# Altium PCB Power_Regulator.PcbDoc
Units mil, origin at the board's own origin, x right, y up, seen from the top; angles counter-clockwise.
Board outline 2710 x 2100 mil, 2 copper layers (Top Layer, Bottom Layer), stack 62.8 mil thick; 15 components, 30 nets, 62 pads, 20 vias.
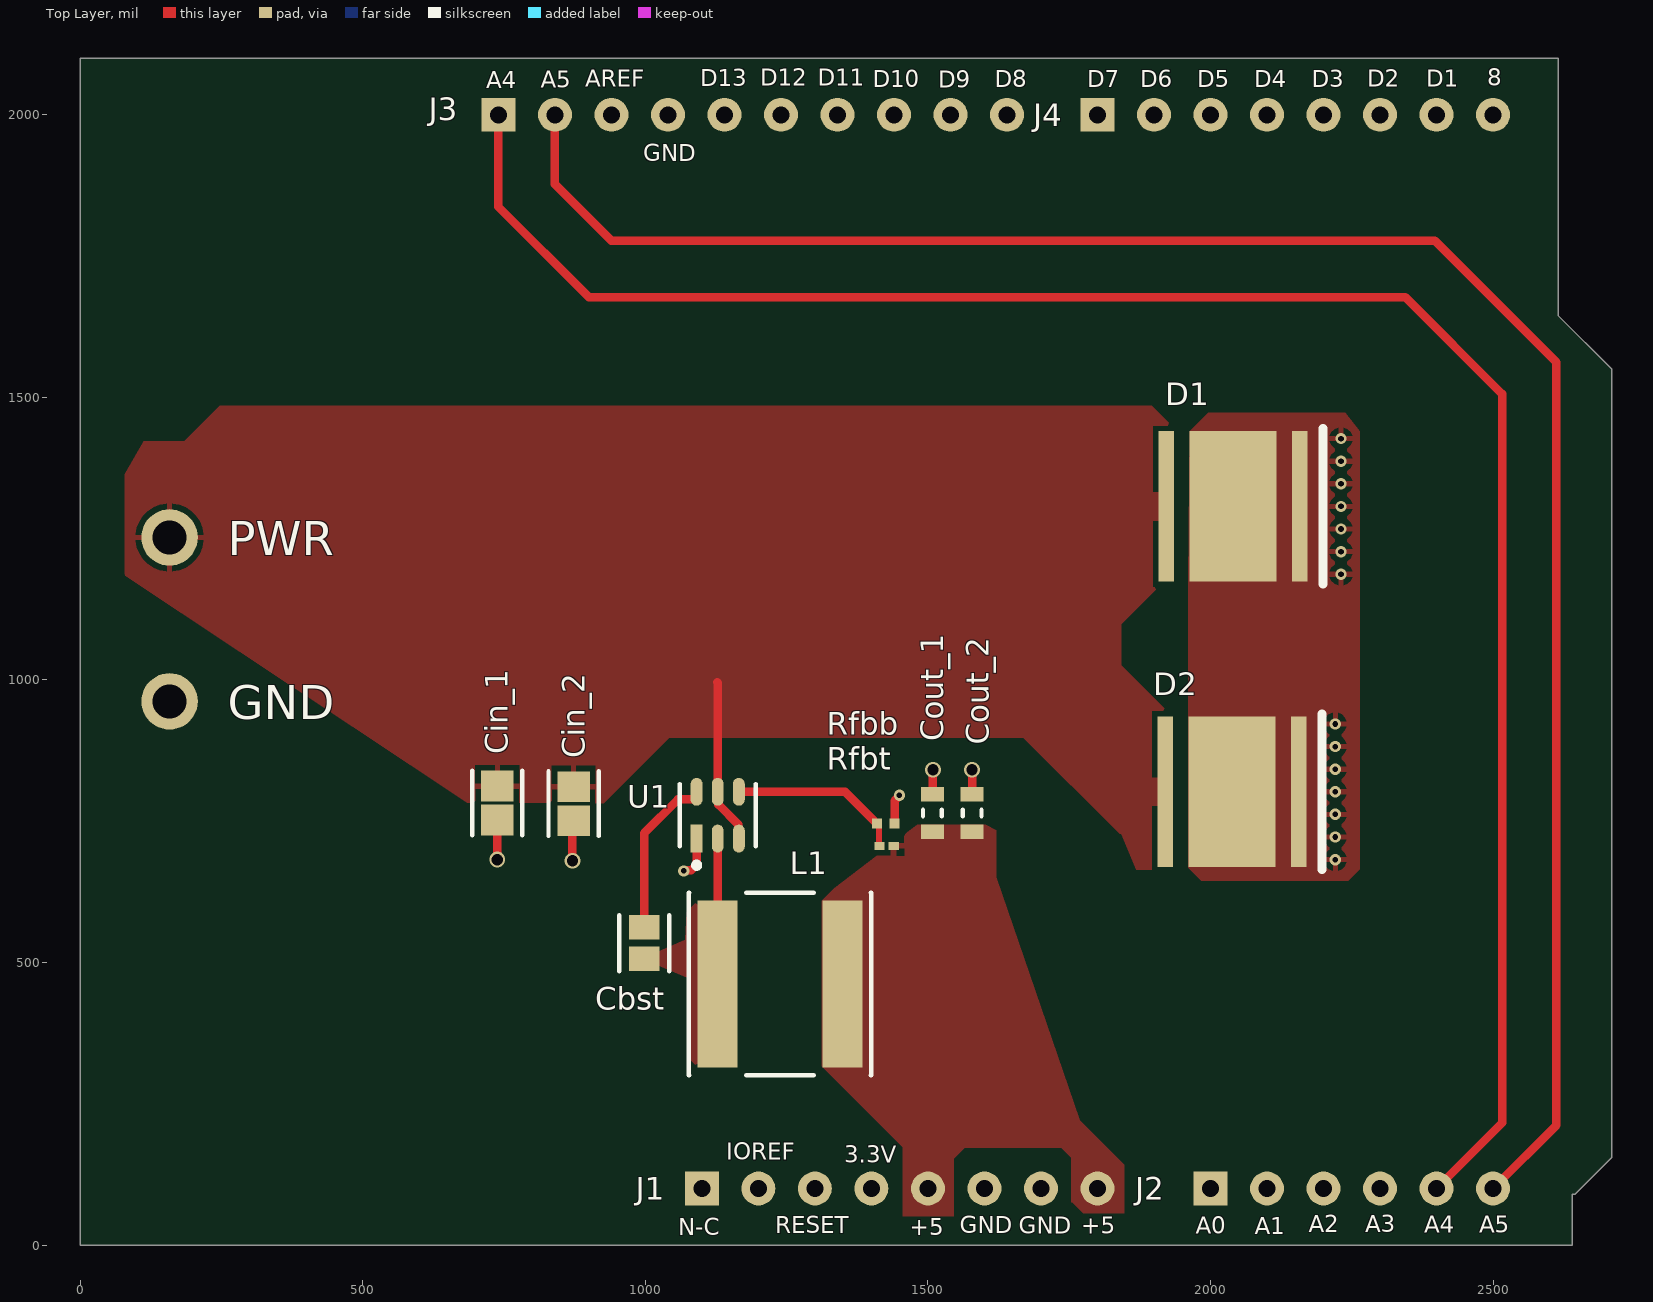
[diagram p0: Top Layer view]
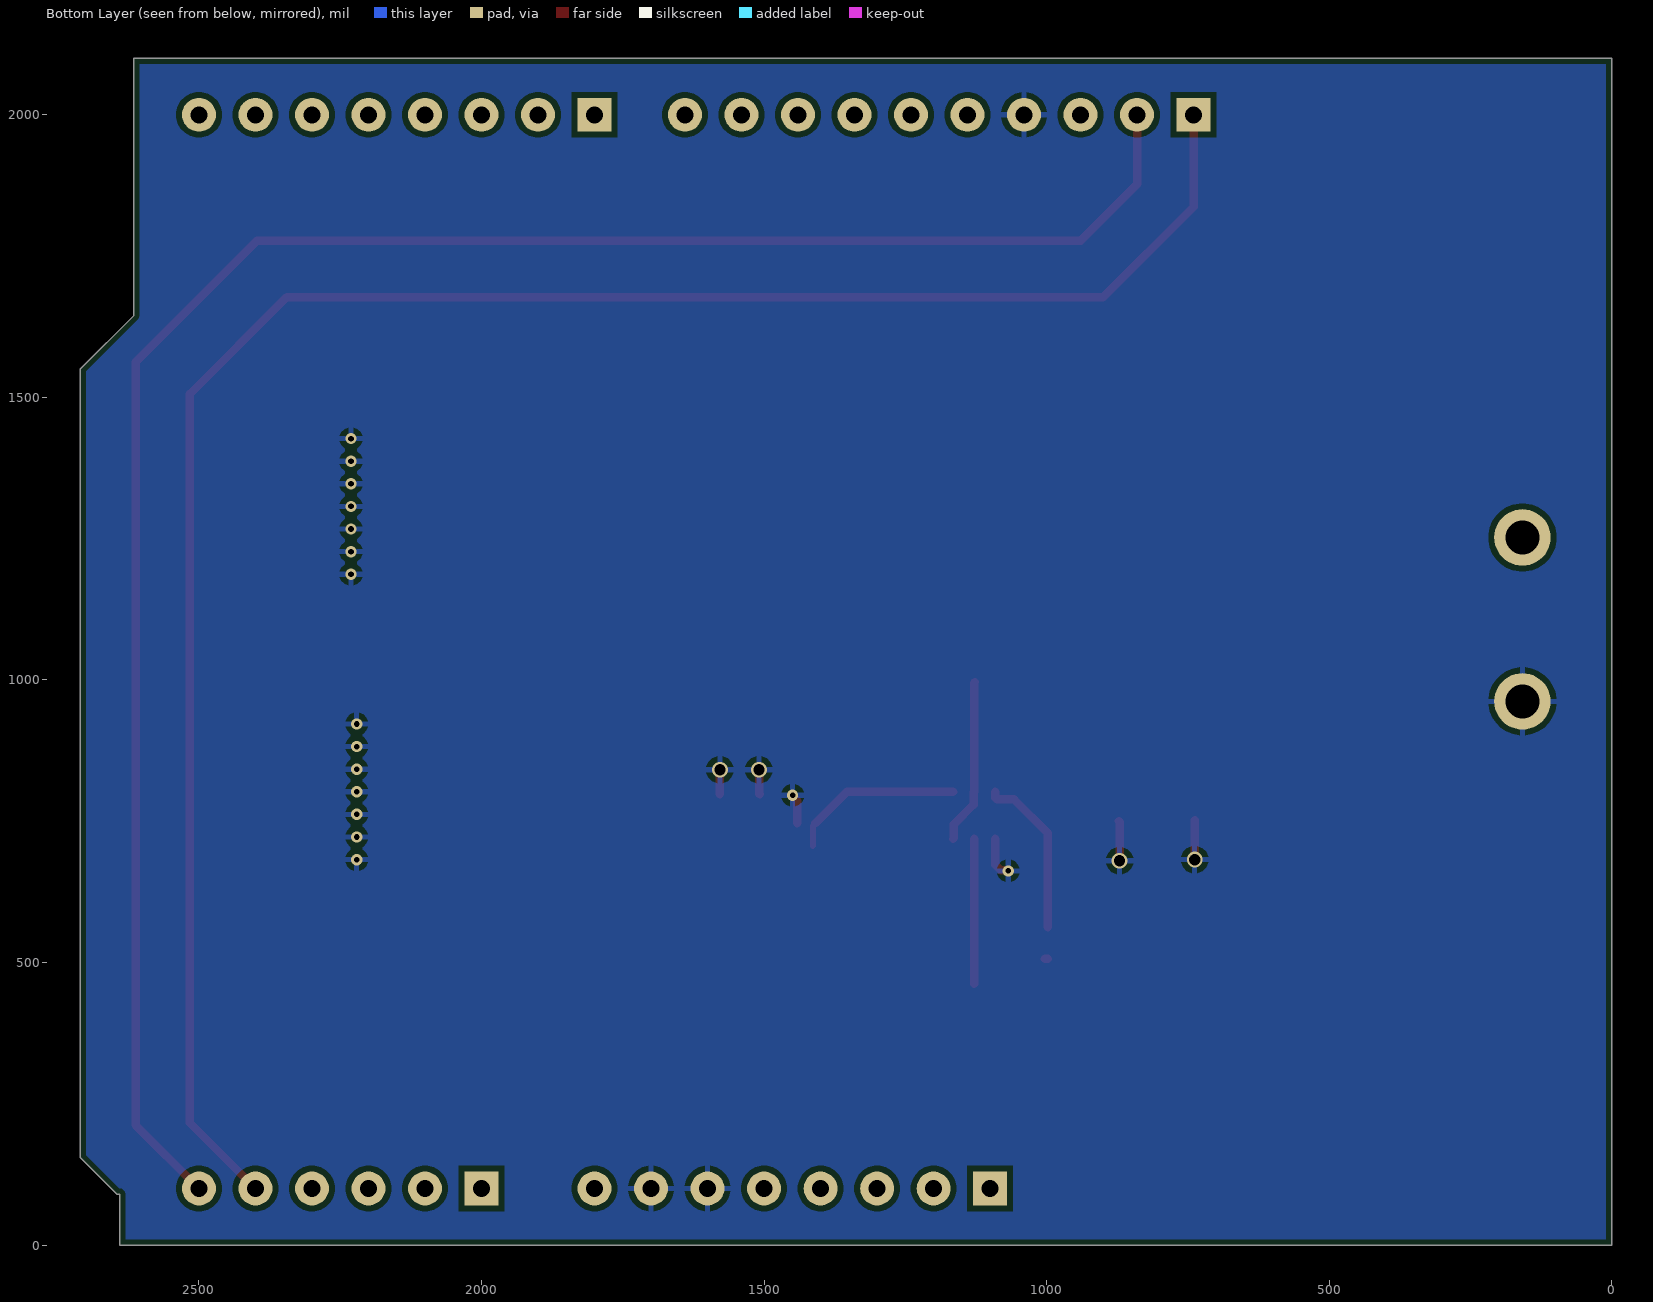
[diagram p1: Bottom Layer view, seen from below]
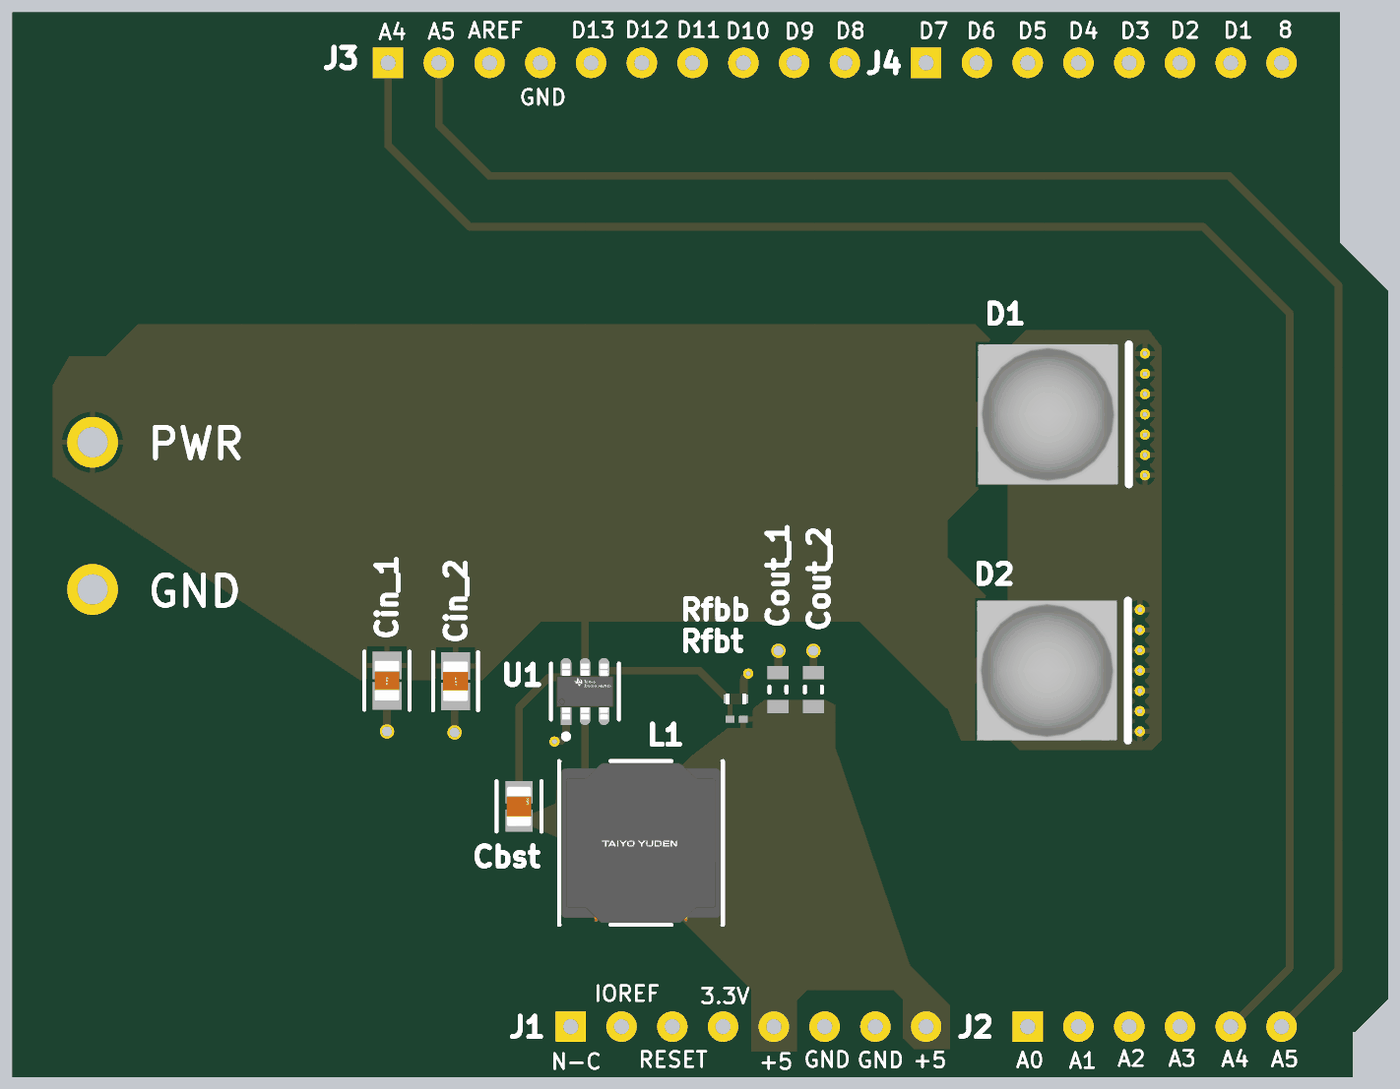
[diagram p2: 3D render of the assembled board from above, using the file's embedded part models]

## Layer stack, top to bottom
Top Solder: solder mask 0.4, Solder Resist, Dk 3.5
Top Layer: signal copper 1.4
Dielectric 1: dielectric 60, FR-4, Dk 4.8
Bottom Layer: signal copper 1.4
Bottom Solder: solder mask 0.4, Solder Resist, Dk 3.5

## Board outline
0,0 0,2100 2615,2100 2615,1645 2710,1550 2710,155 2645,90 2640,90 2640,0

## Design rules (kind name [scope] priority, off if disabled: settings)
BoardOutlineClearance [All] p1: gap=10 ignorepadtopadclearanceinfootprint=FALSE except(0: Arc-SplitContinuation Track-SplitContinuation SMDPad-SplitContinuation THPad-SplitContinuation Via-SplitContinuation Fill-SplitContinuation Poly-SplitContinuation Region-SplitContinuation Text-SplitContinuation)
Clearance Clearance_1 [All] p1: gap=10 ignorepadtopadclearanceinfootprint=TRUE except(0: Arc-Hole Track-Hole SMDPad-Hole THPad-Hole Via-Hole Fill-Hole Poly-Hole Region-Hole Text-Hole)
Clearance [All] p2: gap=10 ignorepadtopadclearanceinfootprint=TRUE except(0: Arc-Hole Track-Hole SMDPad-Hole THPad-Hole Via-Hole Fill-Hole Poly-Hole Region-Hole Text-Hole)
MinimumSolderMaskSliver [All] p1: minsoldermaskwidth=5
PolygonConnect [All] p1: connectstyle=Relief reliefconductorwidth=10 reliefentries=4 polygonreliefangle="90 Angle" airgapwidth=10
RoutingVias [All] p1: holewidth=10 width=18 viastyle="Through Hole" minholewidth=6 minwidth=14 maxholewidth=28 maxwidth=50
SolderMaskExpansion [All] p1: expansion=0 istentingtop=FALSE
Width [All] p1: maxlimit=30 minlimit=5 preferedwidth=10
29 further rules are at their usual default settings.

## Classes and differential pairs
component class PRegulator: Cbst Cin_1 Cin_2 Cout_2 D1 D2 J1 J2 J3 J4 L1 U1

## Components (designator, comment, footprint, x,y, rotation, side; value= is the part's Value field where it differs from the comment)
Cbst "08053C104KAT2A" FP-0805-L_2_01_0_2-W_1_25-IPC_C 998,534.21 r90 top
Cin_1 "C2012X5R1V106K125AC" FP-C2012-125-0_2-IPC_B 738,782.08 r270 top
Cin_2 "C2012X5R1V106K125AC" FP-C2012-125-0_2-IPC_B 873,781 r270 top
Cout_1 "C1608X5R1A226M080AC" CAPC1608X100X20ML10 1508,764.46 r270 top
Cout_2 "C1608X5R1A226M080AC" CAPC1608X100X20ML10 1578,764.46 r270 top
D1 "MKRAWT-00-0000-0D0HG235H" CREE-MK-R-2_V 2039.89,1307 r0 top
D2 "MKRAWT-00-0000-0D0HG235H" CREE-MK-R-2_V 2038,802 r0 top
J1 "1x8 Header" 1x8Header 1100,100 r0 top
J2 "1x6 Header" 1x6Header 2000,100 r0 top
J3 "10 Pin Header" "10 Pin Header-Footprint-1" 740,2000 r0 top
J4 "1x8 Header" 1x8Header 1800,2000 r0 top
L1 "NRS8030T3R3MJGJ" FP-NRS8030-MFG 1238.24,462 r0 top
Rfbb "ERJ2RKF1002X" RESC1005X40X25LL05T05 1425.25,746 r180 top
Rfbt "CRCW020156K2FNED" RESC0603X28X15NL05T05 1426.71,706 r0 top
U1 "TPS562201DDCR" FP-DDC0006A-IPC_C 1128,760.65 r90 top

## Footprints (in the part's own frame and the unit in brackets; to place one, negate y for a bottom-side part, rotate by r counter-clockwise, add the part's x,y. Pads: shape width x height; smd on the part's side, far side on the other; paste and mask are expansions set on the pad)
1x6Header [mil]
  rect 60x60 hole 30: 1(0,0)
  round 60 hole 30: 2(100,0) 3(200,0) 4(300,0) 5(400,0) 6(500,0)
1x8Header [mil]
  rect 60x60 hole 30: 1(0,0)
  round 60 hole 30: 2(100,0) 3(200,0) 4(300,0) 5(400,0) 6(500,0) 7(600,0) 8(700,0)
"10 Pin Header-Footprint-1" [mil]
  rect 60x60 hole 30: 1(0,0)
  round 60 hole 30: 2(100,0) 3(200,0) 4(300,0) 5(400,0) 6(500,0) 7(600,0) 8(700,0) 9(800,0) 10(900,0)
CAPC1608X100X20ML10 [mm] "Chip Capacitor, 2-Leads, Body 1.70x0.90mm, IPC Low Density"
  rect 0.65x1.05 smd: 1(-0.85,0) 2(0.85,0)
  silkscreen extent -0.15,-0.43 0.15,0.43, body extent -0.85,-0.45 0.85,0.45, height 1
CREE-MK-R-2_V [mm] "SMD, 2-Leads, Body 7x7mm, Thermal Pad 3.9x6.76mm"
  rect 0.7x6.76 smd: 1(-3,0) 2(3,0)
  rect 3.9x6.76 smd: 3(0,0)
  silkscreen extent 4.05,-3.5 4.05,3.5, body extent -3.5,-3.5 3.5,3.5, height 4.1
FP-0805-L_2_01_0_2-W_1_25-IPC_C [mil]
  rect 43.49x53.39 smd paste+0 mask+0: 1(-27.79,0) 2(27.79,0)
  silkscreen extent -50,-44 50,44, body extent -53,-32 53,32, height 10
FP-C2012-125-0_2-IPC_B [mil]
  rect 54.25x57.33 smd paste+0 mask+0: 1(-30.08,0) 2(30.08,0)
  silkscreen extent -57,-44 57,44, body extent -67,-39 67,39, height 10
FP-DDC0006A-IPC_C [mm]
  rect 1.254x0.532 smd paste+0 mask+0: 1(-1.05,0.95)
  rrect100% 1.254x0.532 smd paste+0 mask+0: 2(-1.05,0) 3(-1.05,-0.95) 4(1.05,-0.95) 5(1.05,0) 6(1.05,0.95)
  silkscreen extent -2.37,-1.7 1.4,1.7, body extent -1.78,-1.55 1.78,1.55, height 0.25
FP-NRS8030-MFG [mm]
  rect 1.8x7.5 smd paste+0 mask+0: 1(-2.8,0) 2(2.8,0)
  silkscreen extent -4.1,-4.1 4.1,4.1, body extent -4.2,-4.2 4.2,4.2, height 0.25
RESC0603X28X15NL05T05 [mm] "Chip Resistor, 2-Leads, Body 0.60x0.30mm, IPC Medium Density"
  rect 0.45x0.35 smd: 1(-0.325,0) 2(0.325,0)
  body extent -0.33,-0.17 0.33,0.18, height 0.28
RESC1005X40X25LL05T05 [mm] "Chip Resistor, 2-Leads, Body 1.05x0.55mm, IPC High Density"
  rect 0.45x0.45 smd: 1(-0.4,0) 2(0.4,0)
  body extent -0.53,-0.28 0.53,0.28, height 0.4

## Part data
Cbst: library part CMP-2000-05014-2, "General Purpose Ceramic Capacitor, 0805, 100nF, 10%, X7R, 0.15, 25V", Capacitance=100nF, Case Code (Imperial)=0805, Case Code (Metric)=2012, Dielectric=X7R, Insulation Resistance=100GR, Max Operating Temperature=125°C, Min Operating Temperature=-55°C, Package Quantity=1, Tolerance=10%, Voltage=25V, Case/Package=0805, Construction=Flat, Contact Plating=Tin, Depth=1.25mm, Dissipation Factor=3%, Height=0.94mm, Lead Free="Lead Free", Length=2.01mm, Mount="Surface Mount", Number of Pins=2, Packaging="Tape and Reel", Radiation Hardening=No, REACH SVHC="No SVHC", RoHS Compliant=Yes, Series=-, Termination=SMD/SMT, Thickness=0.037inch, Voltage Rating=25V, Voltage Rating (DC)=25V, Width=0.049inch
Cin_1 Cin_2: library part CMP-08246-003469-1, "Multilayer Ceramic Capacitors 10μF ±10% 35V X5R SMD 0805", Capacitance=10uF, Case Code (Imperial)=0805, Case Code (Metric)=2012, Dielectric=X5R, Dielectric Material=Ceramic, Max Operating Temperature=85°C, Min Operating Temperature=-55°C, Package Quantity=2000, Tolerance=10%, Voltage Rating=35V, Case/Package=0805, Height=1.25mm, Lead Free="Lead Free", Length=0.079inch, Mount="Surface Mount", Packaging="Tape and Reel", REACH SVHC="No SVHC", RoHS Compliant=Yes, Series=C, Termination=SMD/SMT, Thickness=0.057inch, Voltage Rating (DC)=35V, Weight=0.000194oz, Width=1.25mm
Cout_1 Cout_2: library part CMP-2000-05441-1, "Chip Capacitor, 22 uF, +/- 20%, 10 V, -55 to 85 degC, 0603 (1608 Metric), RoHS, Tape and Reel", Capacitance=22µF, Manufacturer=TDK, Operating Temperature=-55degC~85degC, Package / Case=0603(1608Metric), Package Description="2-Pin Surface Mount Device, Body 1.6 x 0.8 mm", Package Reference=603, PCN Part Number=MLCCPartNumberChange30/Nov/2012, Ratings=-, Standard Package=1, Temperature Coefficient=X5R, Tolerance=±20%, Voltage - Rated=10V, Applications=GeneralPurpose, Category=Capacitors, Datasheet URL=http://download.siliconexpert.com/pdfs/2015/4/21/15/54/45/779/tdk_/manual/37024850441143360mlcc_commercial_general_en.pdf, Datasheet Version=Mar-15, Design Resources=20WNon-IsolatedBuckLEDDriverUsingPLLNK460KG, Family=CeramicCapacitors, Features=-, Height - Seated (Max)=-, Kits=445-9014-KIT-ND-KITMLCC100PF-22UF060310-50V, Lead Spacing=-, Lead Style=-, Manufacturer URL=http://www.tdk.com/, Mounting Type=SurfaceMount,MLCC, Online Catalog=CSeries,GeneralPurpose, Other Names=445-9077-1, Packaging=CutTape(CT), Product Training Modules=CSeriesGeneralApplicationsSEAT,CCV,andTVCLDesignToolsGuidetoReplacinganElectrolyticCapacitorwithanMLCC, RoHS Information=RoHSCertificate-MLCC, Series=C, Size / Dimension="0.063\"Lx0.031\"W(1.60mmx0.80mm)", Thickness (Max)="0.035\"(0.90mm)"
D1 D2: library part CMP-2100-00977-1, "LED, White, 12 V, 2-Pin SMD, RoHS, Tape and Reel"
J1 J4: library part "8 Pin Header", Supplier Part Number 1=SAM1206-08-ND, Supplier 1=Digikey
J2: library part "6 Pin Header", "SSQ-106-03-T-S", Supplier Part Number 1=SAM1206-06-ND, Supplier 1=Digikey
J3: library part CMP-002-00073-3, "SPQ-110-03-T-S", Design Item ID="10 Pin Header", Source=1x10_Header.SchLib
L1: library part CMP-14484-000405-1, "Inductor Power Shielded Wirewound 3.3uH 20% 100KHz Ferrite 4.2A 24.7mΩ DCR T/R", Case/Package=Nonstandard, Current Rating=4.3A, DC Resistance (DCR)=19mR, Inductance=3.3uH, Inductance Tolerance=20%, Max DC Current=4.2A, Max Operating Temperature=125°C, Min Operating Temperature=-25°C, Package Quantity=1000, Resistor Type=Wirewound, Self Resonant Frequency=50MHz, Test Frequency=100kHz, Core Material=Ferrite, Depth=8.2mm, Halogen Free="Halogen Free", Height=3mm, Height - Seated (Max)=0.118inch, Lead Free="Lead Free", Lead Pitch=5.6mm, Length=8mm, Mount="Surface Mount", Number of Pins=2, Packaging="Tape and Reel", Radiation Hardening=No, REACH SVHC="No SVHC", RMS Current (Irms)=4.3A, RoHS Compliant=Yes, Saturation Current=4.2A, Series=NRS, Shielding=Shielded, Termination=SMD/SMT, Tolerance=20%, Width=0.315inch
Rfbb: library part CMP-2000-07588-1, "Chip Resistor, 10 KOhm, +/- 1%, 0.1 W, -55 to 155 degC, 0402 (1005 Metric), RoHS, Tape and Reel", Case Code (Imperial)=0402, Case Code (Metric)=1005, Manufacturer=Panasonic, Max Operating Temperature=155degC, Max Power Dissipation=100mW, Min Operating Temperature=-55degC, Package Description="2-Pin Surface Mount Device, Body 1 x 0.5 mm", Package Quantity=1, Package Reference=402, Resistance=10KOhm, Temperature Coefficient=100ppm\/degreesC, Tolerance=1%, Voltage Rating=50V, Case\/Package=0402, Composition=ThickFilm, Contact Plating=Tin, Datasheet URL=https://industrial.panasonic.com/cdbs/www-data/pdf/RDA0000/AOA0000C304.pdf, Datasheet Version=02/2017, Depth=0.5mm, Height=0.35mm, Lead Free=LeadFree, Length=1mm, Manufacturer URL=http://www.panasonic.com/, Military Standard=Not, Mount=SurfaceMount, Mounting Technology=SurfaceMount, Number of Pins=2, Number of Terminations=2, Packaging=TapeandReel, Power Rating=100mW, Radiation Hardening=No, REACH SVHC=NoSVHC, RoHSCompliant=True, Termination=SMD/SMT, Voltage Rating (DC)=50V, Width=0.02inch
Rfbt: library part CMP-2004-00723-1, "56.2kOhm, Tolerance = 1.0%, Power = 50 mW", Manufacturer="Vishay Dale", Part Number=CRCW020156K2FNED
U1: library part CMP-04918-000361-1, "IC REG BUCK ADJ 2A TSOT23-6", Case/Package=SOT, Max Input Voltage=17V, Max Operating Temperature=125°C, Max Output Current=2A, Min Input Voltage=4.5V, Min Operating Temperature=-40°C, Output Voltage=7V, Quiescent Current=400uA, Switching Frequency=580kHz, Contact Plating=Tin, Lead Free="Lead Free", Mount="Surface Mount", Number of Outputs=1, Number of Pins=6, Operating Supply Voltage=17V, Output Type=Adjustable, RoHS Compliant=Yes

## Free pads (board coordinates)
  round 100 hole 60: 1(158,1252) 2(158,962)

## Via types
v1: diameter 20, hole 10, Top Layer to Bottom Layer, 16 vias
v2: diameter 28, hole 20, Top Layer to Bottom Layer, 4 vias

## Nets (pads, with @x,y where several pads share a name; then routed paths per layer and width w, separated by ;. In a path a pad name is that pad's centre, name@x,y a point inside that pad or via, vN(x,y) a via of type N, cw(c..) or ccw(c..) an arc to the next point about the centre after c; other vN are vias at no path point)
3.3V: J1.4
+5: Cout_1.2 Cout_2.2 J1.5 J1.8 L1.2 Rfbt.2
+12: Cin_1.1 Cin_2.1 D1.1 D2.1 pad.1 U1.3 U1.5 | length 292.6
  Top Layer w15: 1127,996 1128,995 U1.5 1129.14,800.86 1129.14,779.39 1164.26,744.26 1164.26,720.44 U1.3
A0: J2.1
A1: J2.2
A2: J2.3
A3: J2.4
A4: J2.5 J3.1 | length 3530.2
  Top Layer w15: J3.1 740,1837 900,1677 2345,1677 2516,1506 2516,216 J2.5
A5: J2.6 J3.2 | length 3533.9
  Top Layer w15: J3.2 840,1877 940,1777 2397,1777 2612,1562 2612,212 J2.6
AREF: J3.3
D1: J4.7
D2: J4.6
D3: J4.5
D4: J4.4
D5: J4.3
D6: J4.2
D7: J4.1
D8: J3.10
D9: J3.9
D10: J3.8
D11: J3.7
D12: J3.6
D13: J3.5
GND: Cin_1.2 Cin_2.2 Cout_1.1 Cout_2.1 D1.2 D1.3 D2.2 D2.3 J1.6 J1.7 J3.4 pad.2 Rfbb.1 U1.1 | length 355.5
  Top Layer w10: Cin_2.2@872,749.92 Cin_2.2
  Top Layer w15: v2(738,682) Cin_1.2 ; v2(871,680) 871,748.92 Cin_2.2@872,749.92 ; v1(1068,662) 1068.96,662.96 1080.89,662.96 1090.6,672.67 U1.1 ; Rfbb.1 1441,786.14 1449.5,794.65 v1(1449.5,796) ; Cout_1.1 1508.5,798.43 1508.5,840.5 v2(1509,841) ; Cout_2.1 v2(1578,841)
  other v1: 2221,682 2221,722 2221,762 2221,802 2221,842 2221,882 2221,922 2231,1187 2231,1227 2231,1267 2231,1307 2231,1347 2231,1387 2231,1427
IOREF: J1.2
N-C: J1.1
NetCbst_2: Cbst.2 U1.6 | length 296.1
  Top Layer w15: Cbst.2 998,729 1057.62,788.62 1087.85,788.62 1090.6,791.37 U1.6
NetRfbb_2: Rfbb.2 Rfbt.1 U1.4 | length 309.1
  Top Layer w10: Rfbb.2 1413.36,742.14 1413.36,706.55 Rfbt.1
  Top Layer w15: U1.4 1353.5,802 Rfbb.2
RESET: J1.3
SW_OUT: Cbst.1 L1.1 U1.2 | length 262.3
  Top Layer w15: Cbst.1 Cbst.1@1002.95,506.43 ; L1.1 U1.2
pads on no net: J4.8

## Polygon pours and split planes (outlines as drawn)
SW_OUT on Top Layer "SW_OUT_L01_P050" (solid, pour order 50): 1093,609 1073,589 1070.5,540.5 1024,520 1024,494 1074,473 1074,333 1093,314
+12 on Top Layer "+12_L01_P039" (solid, pour order 39): 79,1364 79,1188 77,1186 685,783 927,782 927,783 1042,898 1669,898 1839,728 1842,728 1868.41,664 1935,664 1935,933 1842,1026 1842,1100 1843,1099 1913,1169 1935,1169 1935,1446 1896,1485 247,1485 184,1422 112,1422
+5 on Top Layer "+5_L01_P042" (solid, pour order 42): 1602,744 1480.9,744 1334.5,631.5 1312,609 1312,316 1455,173 1455,51 1546,51 1546,153 1565,172 1736,172 1754,154 1754,76 1755,76 1775,56 1847,56 1847,142 1768.62,220.38 1621,651 1621,734.17
GND on Top Layer "GND_L01_P019" (solid, pour order 19): 1961,1174 1961,668 1984,645 2244,645 2264,665 2264,1440 2238.86,1473 1996,1473 1963,1440
GND on Bottom Layer "GND_L02_P000" (solid, pour order 0): 2640,0 2640,90 2710,160 2710,1550 2610,1650 2610,2100 0,2100 0,0

## Silkscreen, mask and mechanical layers (free items; w line width, h text height)
Top Overlay:
  text "D12" at 1203,2051 h30
  text "D11" at 1305,2051 h30
  text "8" at 2490,2051 h30
  text "AREF" at 894,2050 h30
  text "D13" at 1097.07,2050.18 h30
  text "D2" at 2277,2050 h30
  text "D1" at 2382,2050 h30
  text "D10" at 1402,2049 h30
  text "D8" at 1618,2049 h30
  text "D7" at 1782,2049 h30
  text "D6" at 1876,2049 h30
  text "D5" at 1977,2049 h30
  text "D4" at 2077,2049 h30
  text "D3" at 2179,2049 h30
  text "A5" at 815,2048 h30
  text "D9" at 1518,2048 h30
  text "A4" at 718,2047 h30
  text "GND" at 996,1918 h30
  text "PWR" at 261,1221 h60
  text "GND" at 261,930 h60
  text "IOREF" at 1143,151 h30
  text "3.3V" at 1352,146 h30
  text "A2" at 2174,23 h30
  text "A3" at 2274,23 h30
  text "A4" at 2378,22 h30
  text "A5" at 2476,22 h30
  text "RESET" at 1230,21 h30
  text "GND" at 1556,21 h30
  text "GND" at 1661,20 h30
  text "+5" at 1771,20 h30
  text "A0" at 1974,20 h30
  text "A1" at 2078,19 h30
  text "N-C" at 1058,17 h30
  text "+5" at 1468,17 h30